# EAGLE board buck_breakout (EAGLE 6.5.0)
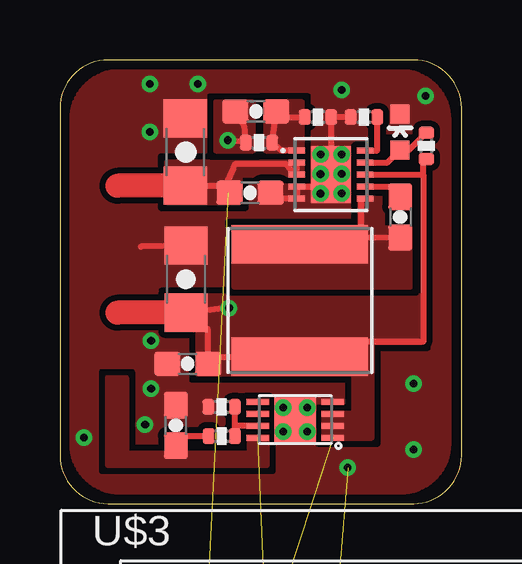
[diagram p0: board, top side]
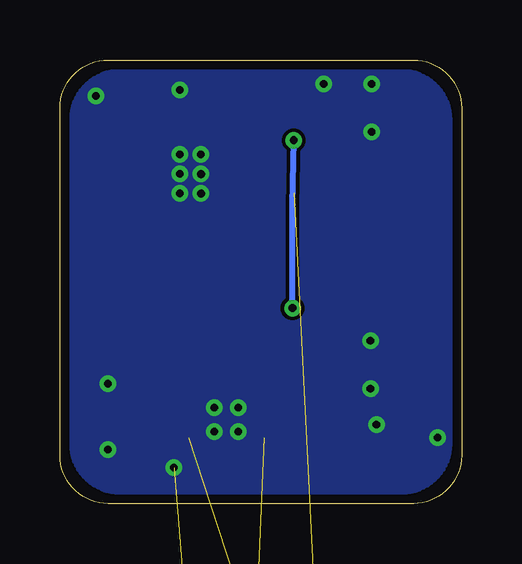
[diagram p1: board, bottom side, seen from below]

Size 16.75 x 18.5 mm. Coordinates in mm from the lower left corner, seen from the top.
Outline: 14.75,18.5 2,18.5 arc90 0,16.5 0,2 arc90 2,0 14.75,0 arc90 16.75,2 16.75,16.5 arc90 14.75,18.5
Copper layers (1*16): Top 0.0356mm / dielectric 1.5011mm / Bottom 0.0356mm
Design rules "LaenPCBOrder": minimum track width 6mil, minimum drill 13mil, track to track 6mil, track to pad 6mil, pad to pad 6mil, via to via 6mil, smd to smd 6mil, copper to edge 15mil, drill to drill 6mil, minimum pad ring 7mil, minimum via ring 7mil, stop-mask expansion 0mil, vias tented up to drill 13mil, thermal gap 10mil

## Footprints (pad centres in the part's own frame; a part is rotated, then mirrored left to right if it is on the bottom)
0603-CAP = smd 1.1 x 1: 1 -0.85,0; 2 0.85,0
1206 = smd 1.6 x 1.8: 1 -1.4,0; 2 1.4,0
0402-CAP = smd 0.7 x 0.9: 1 -0.65,0; 2 0.65,0
1X09_LOCK = drill 1.016 pad 1.88: 1 0,0.127; 2 2.54,-0.127; 3 5.08,0.127; 4 7.62,-0.127; 5 10.16,0.127; 6 12.7,-0.127; 7 15.24,0.127; 8 17.78,-0.127; 9 20.32,0.127
1X02_LOCK = drill 1.016 pad 1.88: 1 -0.178,0; 2 2.718,0
NR6028T150M = smd 1.6 x 5.7: 1 -2.35,0; 2 2.35,0
LED-0603 = smd 0.8 x 0.8: A 0,-0.75; C 0,0.75
0402-S = smd 0.5 x 0.65: 1 -0.55,0; 2 0.55,0
0402-RES = smd 0.7 x 0.9: 1 -0.65,0; 2 0.65,0
DD10 = smd 0.25 x 0.7: 1 -1,-1.425; 2 -0.5,-1.425; 3 0,-1.425; 4 0.5,-1.425; 5 1,-1.425; 6 1,1.425; 7 0.5,1.425; 8 0,1.425; 9 -0.5,1.425; 10 -1,1.425 | smd 2.38 x 1.65: EP\ 0,0
2X3_DFN = smd 0.94 x 0.25: 1 -1.57,0.75; 2 -1.57,0.25; 3 -1.57,-0.25; 4 -1.57,-0.75; 5 1.57,-0.75; 6 1.57,-0.25; 7 1.57,0.25; 8 1.57,0.75 | smd 1.72 x 1.84: EP 0,0
ER-OLED0.96-2 = smd 0.5 x 2.75: 1 0,0; 2 0.7,0; 3 1.4,0; 4 2.1,0; 5 2.8,0; 6 3.5,0; 7 4.2,0; 8 4.9,0; 9 5.6,0; 10 6.3,0; 11 7,0; 12 7.7,0; 13 8.4,0; 14 9.1,0; 15 9.8,0; 16 10.5,0; 17 11.2,0; 18 11.9,0; 19 12.6,0; 20 13.3,0; 21 14,0; 22 14.7,0; 23 15.4,0; 24 16.1,0; 25 16.8,0; 26 17.5,0; 27 18.2,0; 28 18.9,0; 29 19.6,0; 30 20.3,0

## Placement (x,y rotation side)
C1  100nF  [0603-CAP]  7.93,12.96 0 top
C2  2.2uF  [1206]  5.23,14.66 90 top
C3  0.22uF  [0603-CAP]  14.19,11.94 270 top
C4  22pF  [0603-CAP]  8.17,16.35 0 top
C5  22uF  [1206]  5.26,9.36 90 top
C6  100nF  [0603-CAP]  5.33,5.83 180 top
C7  1uF  [0402-CAP]  11,-29.75 0 top  (outside the outline)
C8  1uF  [0603-CAP]  4.84,3.26 90 top
C9  1uF  [0402-CAP]  14.25,-29.75 0 top  (outside the outline)
C10  1uF  [0402-CAP]  17.5,-29.75 0 top  (outside the outline)
C11  1uF  [0402-CAP]  20.75,-29.75 0 top  (outside the outline)
C12  2.2uF  [0402-CAP]  24,-29.75 0 top  (outside the outline)
C13  4.7uF  [0402-CAP]  27.25,-29.75 0 top  (outside the outline)
JP2  M09LOCK  [1X09_LOCK]  2,-24.75 0 top  (outside the outline)
JP3  M02LOCK  [1X02_LOCK]  2,-32 0 top  (outside the outline)
L1  15uH  [NR6028T150M]  10,8.47 270 top
LED1  [LED-0603]  14.18,15.49 0 top
R1  169K  [0402-S]  12.68,16.12 0 top
R2  1M  [0402-S]  8.3,15.05 180 top
R3  576K  [0402-S]  10.76,16.12 180 top
R4  330  [0402-S]  15.28,14.91 270 top
R5  1.1M  [0402-S]  6.75,2.81 180 top
R6  160k  [0402-S]  6.74,4.04 0 top
R7  390K  [0402-RES]  1.75,-37 0 top  (outside the outline)
U$1  LM3990  [DD10]  11.3,13.72 270 top
U$2  MCP1725  [2X3_DFN]  9.81,3.5 180 top
U$3  ER-OLED0.96-2  [ER-OLED0.96-2]  3.25,-11.5 0 top  (outside the outline)

## Library data of the parts
C1-C13 LED1 R1-R7 = chips
JP2 JP3 = SparkFun-Connectors
L1 U$1 = brent
U$2 U$3 = intelliDesk

## Nets
3.3V: C8.1 C11.2 JP2.2 R5.2 U$2.8 U$3.9
3.6V: C4.1 C5.1 C6.1 C10.1 JP2.3 L1.2 R2.2 R4.2 U$1.8 U$2.1 U$2.2 U$2.3 U$3.6
C/D#: JP2.7 U$3.15
CS#: JP2.6 U$3.13
FB: C4.2 R2.1 R3.2 U$1.1
GND: C1.2 C2.2 C5.2 C6.2 C8.2 C10.2 C11.1 C12.2 C13.2 JP2.1 JP3.1 LED1.C R1.1 R3.1 R6.1 R7.1 U$1.4 U$1.5 U$1.EP\ U$2.4 U$2.EP U$3.1 U$3.8 U$3.10 U$3.11 U$3.12 U$3.16 U$3.17 U$3.21 U$3.22 U$3.23 U$3.24 U$3.25 U$3.29 U$3.30
MOSI: JP2.9 U$3.19
N$1: C12.1 U$3.28
N$2: LED1.A R4.1 U$1.9
N$3: C13.1 U$3.27
N$4: C3.1 U$1.7
N$5: R7.2 U$3.26
N$6: R5.1 R6.2 U$2.7
N$7: R1.2 U$1.10
N$8: C9.1 U$3.4
N$9: C9.2 U$3.5
N$11: C7.2 U$3.3
N$12: C7.1 U$3.2
PWR_DN: JP2.4
RESET: JP2.5 U$3.14
SCK: JP2.8 U$3.18
SW: C3.2 L1.1 U$1.6
VIN: C1.1 C2.1 JP3.2 U$1.2 U$1.3

## Tracks (layer width: path | path; a pad name or v marks a point on that pad's centre or on a via)
3.3V  (3 unrouted)
  Top 0.25: R5.2 4.84,2.81 C8.1
  pour Top (no thermals): 7.93,2.75 8.62,2.75 8.62,1.6 2,1.6 2,5.25 2.75,5.25 2.75,2.1 7.93,2.1
3.6V  (via drill 0.33)  (3 unrouted)
  Top 0.25: 6.24,6.12 L1.2 | 7.69,15.98 C4.1 7.69,15.73 R2.2 7.76,15.1 v7,15.15 | C6.1 6.17,7.27 C5.1 6.79,8.16 v7.05,8.15 | 15.15,13.72 15.15,6.75 10.63,6.75 | U$1.8 15.15,13.72 | 15.15,13.72 15.15,14.23 R4.2
  Top 1: C5.1 2.4,7.96
  Bottom 0.25: v7.05,8.15 7.05,12.45 v7,15.15
  pour Top (isolate 0.25, rank 2, no thermals): 5.75,7.45 5.75,5.42 12.75,5.42 12.73,6.75 15.1,6.75 15.1,8.65 4.48,8.63 4.5,7.45
  pour Top (isolate 0.25, no thermals): 8.06,14.72 8.05,16.72 6.5,16.73 6.5,14.72
  pour Top (no thermals): 11,3.75 11,2.75 13,2.75 13,7 12.25,7 12.25,3.75
C/D#  (1 unrouted)
CS#  (1 unrouted)
FB
  Top 0.25: R3.2 9.05,16.12 9.05,16.15 C4.2 9.04,16.33 R2.1 9.24,14.72 U$1.1
  pour Top (isolate 0.25, rank 2, no thermals): 10.1,14.72 10.1,16.73 8.59,16.73 8.59,14.72
GND  (via drill 0.33)  (21 unrouted)
  Top 0.25: R1.1 R3.1 11.3,15.98 U$1.EP\ 11.3,13.22 U$1.4 U$1.5 8.76,12.72 C1.2 | C5.2 3.37,10.71
  other vias: 11.75,17.25 3.55,3.29 9.31,3 9.31,4 10.31,4 10.31,3 10.87,12.93 10.87,13.74 10.87,14.56 11.75,14.56 11.75,13.75 11.75,12.94 3.75,17.5 5.75,17.5 15.25,17 14.75,5 12,1.5 14.75,2.25 1,2.75 3.8,4.79 3.8,6.79 3.75,15.5
  pour Top (isolate 0.25, rank 5, no thermals): 16.21,2.5 16.21,16 arc90 14.21,18 2.5,18 arc90 0.5,16 0.5,2.5 arc90 2.5,0.5 14.21,0.5 arc90
  pour Bottom: 0.5,2.5 0.5,16 arc-90 2.5,18 14.25,18 arc-90 16.25,16 16.25,2.5 arc-90 14.25,0.5 2.5,0.5 arc-90
MOSI  (1 unrouted)
N$1  (1 unrouted)
N$2
  Top 0.25: U$1.9 13.66,14.22 LED1.A 14.55,14.74 R4.1
N$3  (1 unrouted)
N$4
  Top 0.25: U$1.7 14.19,13.22 C3.1
N$5  (1 unrouted)
N$6
  Top 0.25: U$2.7 7.29,3.25 | R5.1 7.3,3.19 7.29,3.25 | 7.29,3.25 R6.2
N$7
  Top 0.25: U$1.10 13.23,14.72 R1.2
N$8  (1 unrouted)
N$9  (1 unrouted)
N$11  (1 unrouted)
N$12  (1 unrouted)
RESET  (1 unrouted)
SCK  (1 unrouted)
SW
  Top 0.25: U$1.6 12.55,12.72 12.55,11.08 | L1.1 10,10.75 12.15,10.75 12.15,10.95 12.55,10.95 12.55,11.08 | C3.2 12.55,11.08
  pour Top (isolate 0.25, no thermals): 12.51,12.72 12.5,11.5 7.27,11.49 7.27,9.05 14.6,9.05 14.6,11.46 13.45,11.46 13.46,12.72
VIN  (1 unrouted)
  Top 0.25: U$1.2 U$1.3 9.78,13.72 9.45,14.15 7.3,14.15 7.22,13.97 7,13.5 7,12.96 C1.1 6.7,13.26 C2.1
  Top 1: C2.1 2.4,13.26
  pour Top (isolate 0.25, rank 2, no thermals): 10.1,13.72 10.1,14.22 4.45,14.22 4.45,12.58 7.51,12.58 7.51,13.72